# Altium PCB PCB1.PcbDoc (part 3 of 3)
Units mil, origin at the board's own origin, x right, y up, seen from the top; angles counter-clockwise.
Board outline 3930 x 3600 mil, 2 copper layers (Top Layer, Bottom Layer), stack 65.792 mil thick; 169 components, 135 nets, 555 pads, 164 vias.
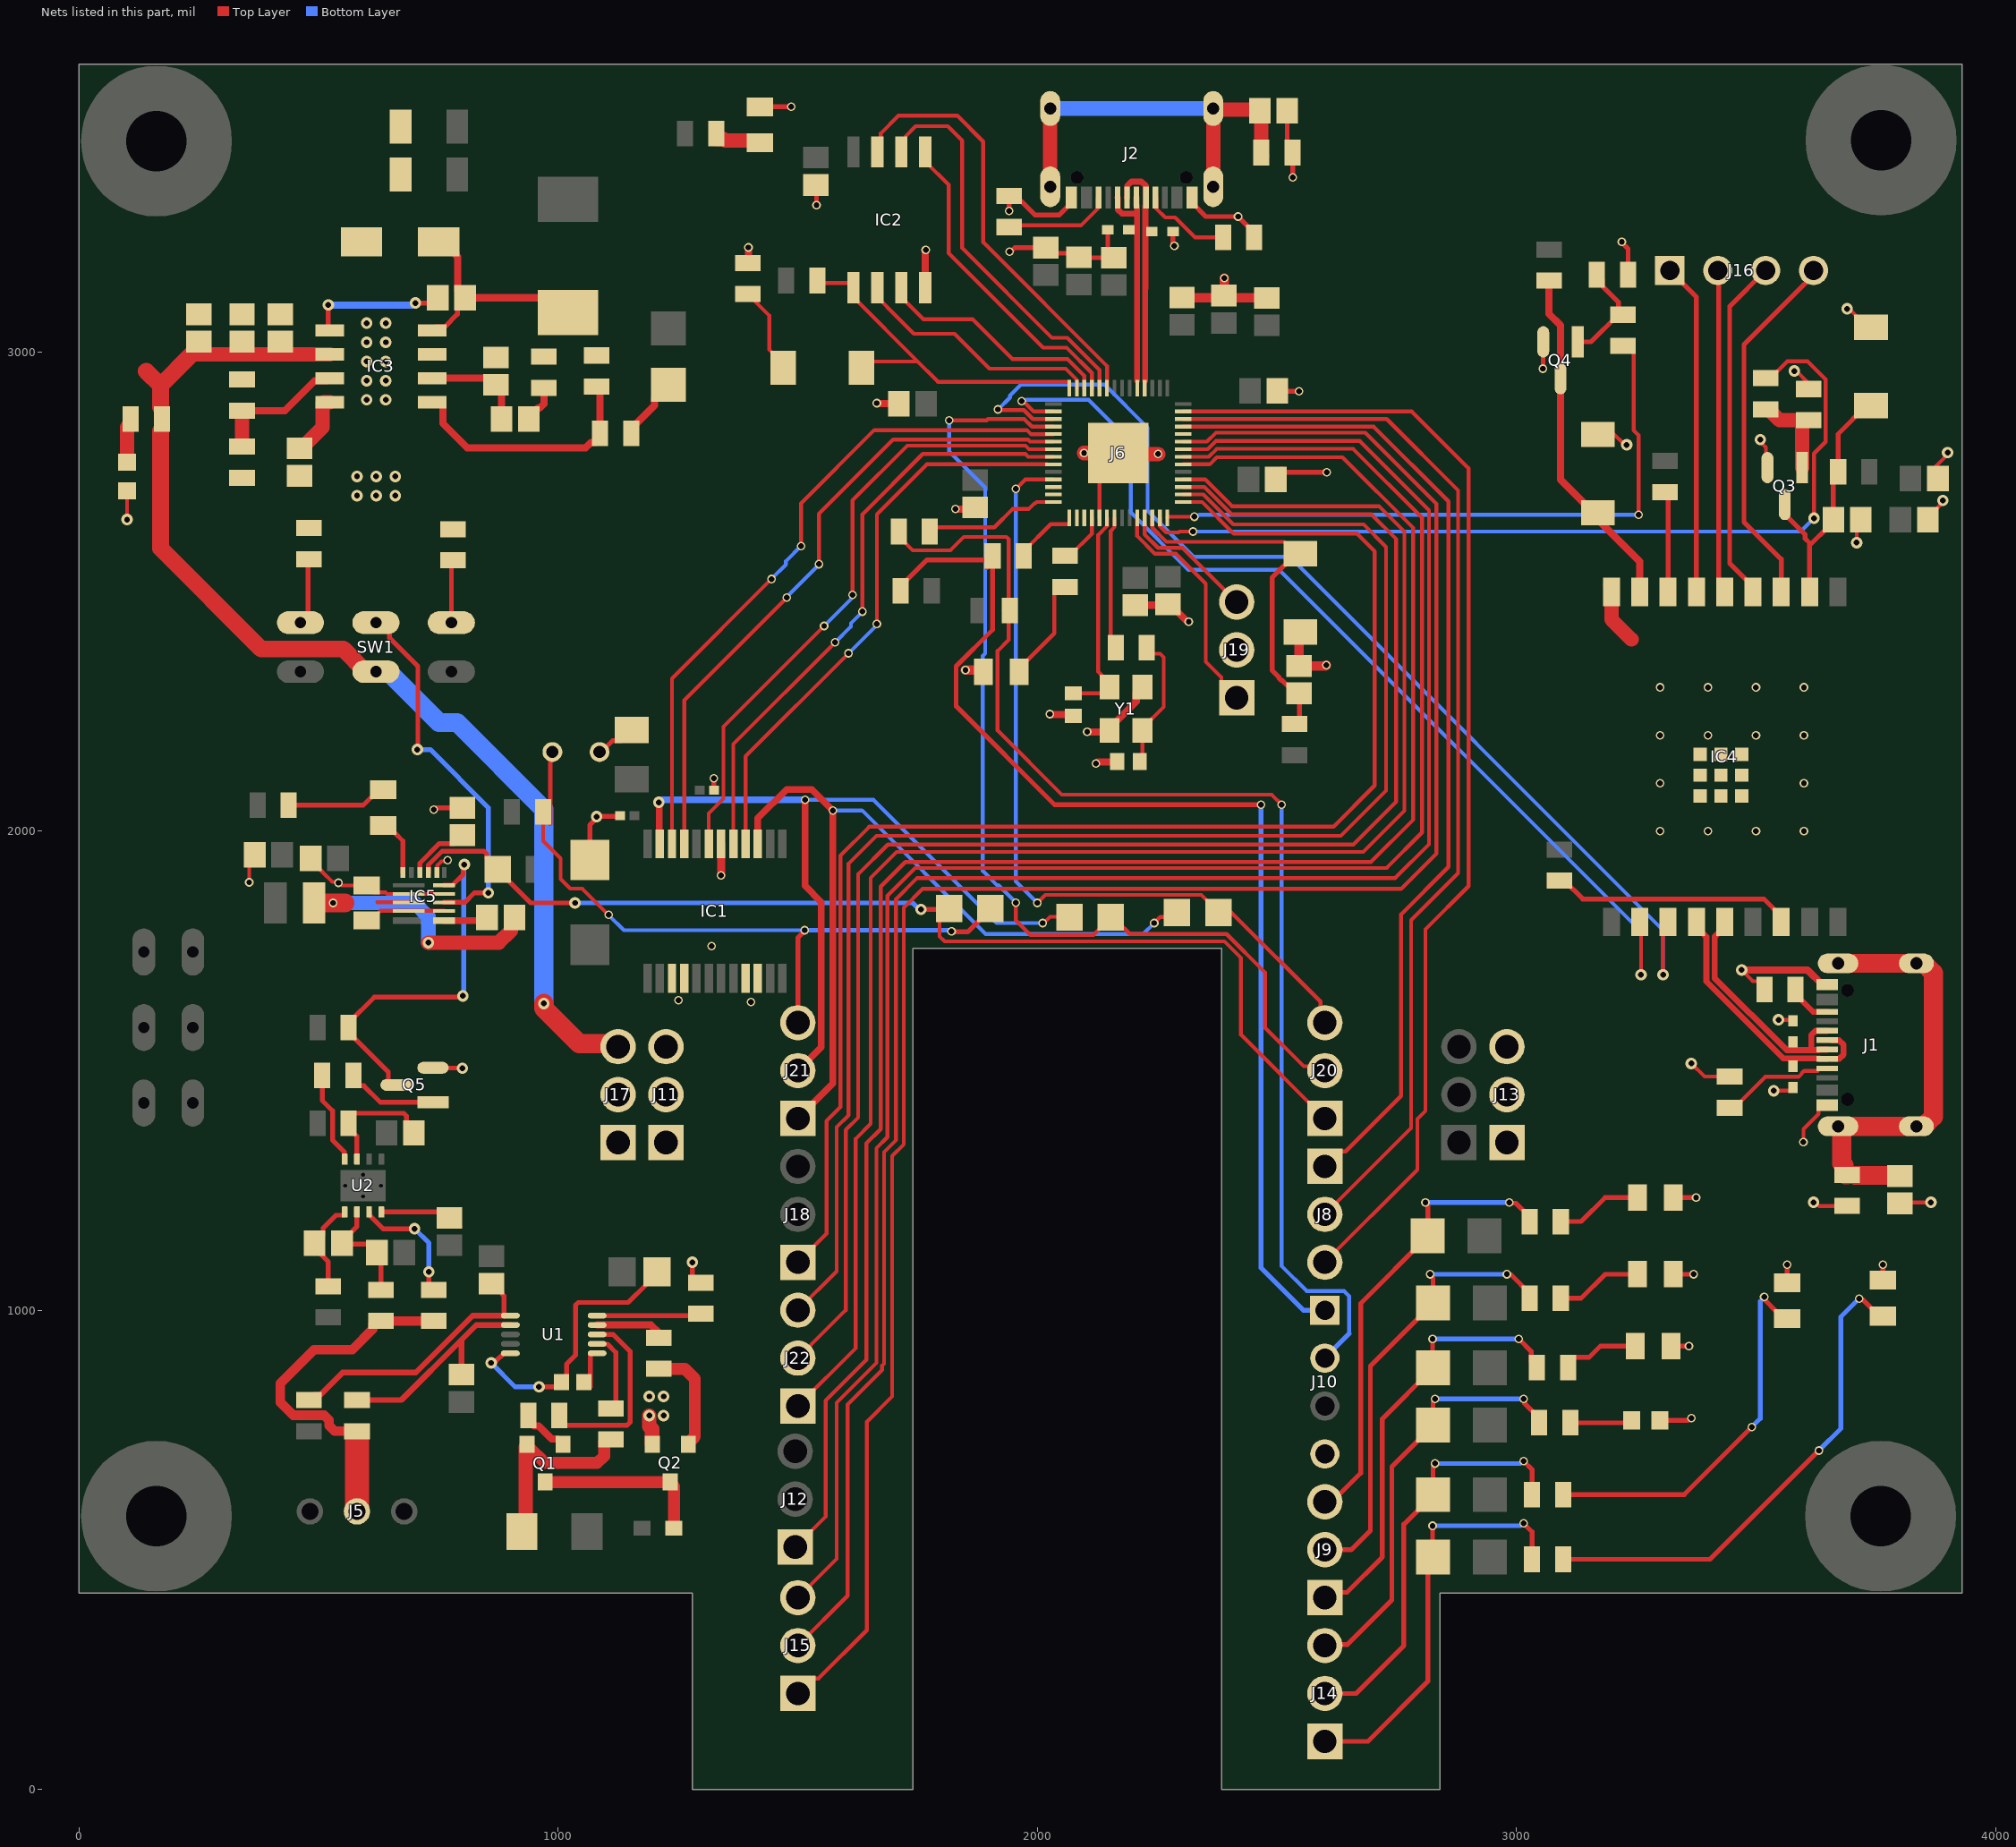
[diagram p2: the nets of this part, all layers, seen from the top]

## Via types
v1: diameter 18, hole 12, Top Layer to Bottom Layer, 108 vias
v2: diameter 24, hole 12, Top Layer to Bottom Layer, 56 vias

## Nets (pads, with @x,y where several pads share a name; then routed paths per layer and width w, separated by ;. In a path a pad name is that pad's centre, name@x,y a point inside that pad or via, vN(x,y) a via of type N, cw(c..) or ccw(c..) an arc to the next point about the centre after c; other vN are vias at no path point) (continued)
Black_1: J6.37 J15.1 | length 4225.5
  Top Layer w8: J15.1@1500,200 1531.39,231.39 1543.39,231.39 1644,332 1644,767 1697,820 1697,1322 1721,1346 1721,1840 1760.35,1879.35 2759.35,1879.35 2833,1953 2833,2683 2684.38,2831.62 2372.81,2831.62 2353.81,2812.62 J6.37@2304.35,2812.62
Black_2: J6.32 J22.1 | length 3426.5
  Top Layer w8: J22.1@1500,800 1621,921 1621,1358 1652,1389 1652,1902 1706.5,1956.5 2680.14,1956.5 2766,2042.36 2766,2625 2713,2678 2406.22,2678 2350.34,2733.88 J6.32@2304.35,2733.88
BOOT_ESP32: IC4.8 Q4.3 R39.2 S4.2 | length 735.2
  Top Layer w15: R39.2@3068,3148.5 3068,3079.37 3091.98,3055.4 Q4.3@3091.98,2944.09 3091.98,2733.47 S4.2@3161.14,2664.31 ; S4.2@3158.42,2661.58 3257.4,2562.6 IC4.8@3257.4,2498.98
  Top Layer w30: S4.2@3161.14,2664.31 S4.2@3170,2664.31
"Charging Select": IC5.9 SW1.2 | length 784.5
  Top Layer w10: SW1.2@631,2446.21 647.85,2429.36 647.85,2403.15 707,2344 707,2171 v2(706,2170) ; IC5.9@761.93,1851.14 805.16,1851.14 825.02,1871 v2(854,1871)
  Bottom Layer w10: v2(706,2170) 733,2170 854,2049 v2(854,1871)
Enable_Charger: IC5.7 Q5.3 R38.1 | length 784
  Top Layer w10: Q5.3@661.55,1470 652.08,1470 645.3,1476.78 645.3,1497.34 562.5,1580.14 R38.1@562.5,1590 562.5,1599.86 615.96,1653.32 798.32,1653.32 v2(801,1656) ; IC5.7@761.93,1887.09 779.39,1887.09 801.32,1909.02 801.32,1927.32 v2(804,1930)
  Bottom Layer w10: v2(801,1656) 802.5,1657.5 802.5,1928.5 v2(804,1930)
Enable_ESP32: C30.1 IC4.2 Q3.3 R33.2 S2.2 | length 534.6
  Top Layer w10: Q3.3@3560,2681.55 3560,2661.23 3602.5,2618.73 3602.5,2610.5 3611.73,2601.27 ; IC4.2@3611.73,2498.98 3611.73,2596.34 C30.1@3653.82,2638.43 ; C30.1@3661.46,2650 3661.46,2740.01 R33.2@3671.45,2750 3671.45,2828.61 3731.14,2888.31 S2.2@3740,2888.31
ESP_CC1: J1.A5 R1.1 | length 216.5
  Top Layer w8: R1.1@3445,1422.5 3454.86,1422.5 3519.36,1487 3589.07,1487 3595.54,1493.47 3595.54,1494.6 3600.23,1499.29 J1.A5@3629,1499.29
ESP_CC2: J1.B5 R3.1 | length 91.1
  Top Layer w12: R3.1@3582.5,1669 3582.5,1659.14 3618.87,1622.77 3648.58,1622.77 J1.B5@3648.68,1622.68
ESP_RX: IC4.11 J6.2 | length 2116.7
  Top Layer w8: v1(1967,2897) 1970.98,2897 1992.36,2875.61 J6.2@2033.65,2875.61 ; IC4.11@3257.4,1810 3260,1807.4 v2(3260,1700)
  Bottom Layer w8: v1(1967,2897) 1968.91,2898.91 1975.6,2898.91 1976.69,2900 2107,2900 2195,2812 2195,2665 2315,2545 2505,2545 3260,1790 v2(3260,1700)
ESP_TX: IC4.12 J6.3 | length 2316.5
  Top Layer w8: v1(1918,2880) 1919.5,2878.5 1971.8,2878.5 1990.43,2859.87 J6.3@2033.65,2859.87 ; v2(3306,1700) 3306,1799.54 IC4.12@3316.46,1810
  Bottom Layer w8: v1(1918,2880) 1942.8,2904.8 1942.8,2908.8 1965.69,2931.69 2140.31,2931.69 2230,2842 2230,2668.33 2325.83,2572.5 2526.5,2572.5 3306,1793 v2(3306,1700)
ESP_USB_D_N: D4.1 IC4.13 J1.A7 J1.B7 | length 529.2
  Top Layer w12.65: IC4.13@3375.51,1810 3375.51,1798.19 3386.9,1786.8 3389.05,1786.8 3396.46,1779.39 3396.46,1686.13 3557.08,1525.52 3631.52,1525.52 3632.78,1524.25 J1.B7@3648.68,1524.25 ; J1.B7@3658,1524.67 3673.67,1524.67 3682.76,1533.76 3682.76,1553.71 3673.26,1563.2 J1.A7@3659,1563.2
ESP_USB_D_P: D2.1 IC4.14 J1.A6 J1.B6 | length 495.1
  Top Layer w12.65: IC4.14@3434.57,1810 3434.57,1798.19 3423.18,1786.8 3421.02,1786.8 3413.61,1779.39 3413.61,1693.24 3564.18,1542.67 3611,1542.67 ; J1.A6@3648.68,1543.94 3632.78,1543.94 3631.52,1542.67 3611,1542.67 ; J1.B6@3648.68,1583.31 3648.26,1582.89 3624.09,1582.89 3615.21,1574.01 3615.21,1546.88 3611,1542.67
GND: C1.1 C2.2 C3.2 C4.1 C5.1 C6.2 C9.1 C10.1 C12.2 C13.2 C14.2 C16.2 C17.2 C18.2 C19.2 C20.2 C21.2 C22.2 C23.2 C24.2 C25.2 C26.2 C27.2 C28.2 C29.2 C30.2 C31.2 C33.2 C34.2 C35.2 C36.2 C40.2 C41.2 C43.2 C44.2 D1.2 D2.2 D3.2 D4.2 D5.2 D6.2 IC1.3 IC1.4 IC1.9 IC1.10 IC1.18 IC2.4 IC3.7 IC4.9 IC4.19 IC4.20 IC4.21 IC4.22 IC4.23 IC4.24 IC4.25 IC4.26 IC4.27 IC5.5 IC5.8 IC5.15 J1.A1_B12 J1.A12_B1 J2.A1_B12 J2.A12_B1 J6.19 J6.57 J10.4 J11.1 J11.2 J11.3 J13.1 J13.2 J13.3 J19.2 LED1.2 LED2.1 LED3.2 LED4.2 LED5.2 LED6.2 LED8.1 LED9.2 LED10.2 Q2.2 Q3.2 Q4.2 Q5.2 R1.2 R2.2 R3.2 R4.2 R6.1 R7.1 R15.1 R16.2 R17.1 R20.2 R21.2 R34.1 R43.1 R48.1 R51.1 RT1.1 S2.1 S3.2 S4.1 Y1.2 Y1.4 | length 4927.8
  Top Layer w8: v2(100,2650) LED2.1@100,2710.47 ; v1(355,1893) 355,1938.54 C43.2@366.46,1950 ; R51.1@464,2635.33 465,2635.33 R51.1@475,2645.33 ; C44.2@483.46,1943 483.46,1939.06 508.73,1913.79 508.73,1913.58 528.4,1893.91 539.09,1893.91 v1(541,1892) 543.71,1892 549.29,1886.42 C40.2@600,1886.42 614.7,1871.72 639.87,1871.72 642.73,1868.86 IC5.15@688.11,1868.86 IC5.8@761.93,1868.86 ; IC5.5@746.57,1913.66 747.5,1914.58 747.5,1928.2 756.22,1936.93 766.92,1936.93 v1(768.84,1938.84) ; R48.1@778,2632 R48.1@780,2630 ; J6.19@2129.63,2653.65 2129.63,2749.63 J6.57@2169,2789 ; IC4.9@3184.63,2512.69 IC4.9@3198.35,2498.98 ; S4.1@3202.05,2829.82 v2@3225.87,2806 ; v2(3365,1515) 3392.5,1487.5 R1.2@3445,1487.5 ; v2(3470,1710) 3493.35,1686.65 3510.85,1686.65 R3.2@3527.5,1670 ; v2(3509,2817) 3509,2812.67 3520.78,2800.89 3520.78,2759.01 Q3.2@3517.95,2756.18 ; v2(3537,1458) 3571.09,1458 D4.2@3576,1462.91 ; v2(3547,1606) 3575.05,1606 D2.2@3577,1604.05 ; v2@3584.13,2960 R34.1@3607.95,2936.18 ; v1(3599,1351) 3599,1378 3630.53,1409.53 3630.53,1420.47 J1.A1_B12@3631.04,1420.98 ; v2(3620,1225) 3624.33,1225 3631.83,1217.5 R6.1@3690,1217.5 ; v2@3694.13,3090 S2.1@3717.95,3066.18 ; v2(3710,2602) 3710,2627.43 3710.53,2627.95 C30.2@3733.82,2627.95 ; C4.1@3800,1222.91 3802.09,1225 v2(3865,1225) ; C23.2@3866.18,2662.05 v2@3890,2685.87 ; C22.2@3876.18,2762.05 v2@3900,2785.87
  Top Layer w10: Q5.2@738.45,1506.02 738.96,1505.51 799.49,1505.51 v2(800,1505) ; v1(740,2045) 742.16,2045 745.71,2048.54 C41.2@800,2048.54 ; D1.2@1066,1939.58 1066,2012.21 1080,2026.21 v2(1080,2030) 1081,2031 1128.1,2031 C2.2@1129.1,2032 ; RT1.1@1086.21,2165 1089.77,2165 1113.22,2188.44 1130.44,2188.44 C1.1@1153,2211 ; v2(1280,1100) 1280,1069.33 1291.84,1057.5 R15.1@1298,1057.5 ; C3.2@1325,2085 v1(1325,2110) ; LED1.2@1421,3511.4 1421.6,3512 v1(1486,3512) ; C6.2@1538,3348.46 1539,3347.46 v1(1539,3306) ; v1(1941,3294) R4.2@1941,3325.5 ; R4.2@1941,3321 1948.34,3313.66 1967.34,3313.66 1995,3286 2045.87,3286 2071.02,3311.15 J2.A12_B1@2071.02,3321.98 ; v1(1942,3209) 1944.16,3209 1952.71,3217.54 C19.2@2018,3217.54 ; C19.2@2021.94,3217.54 2033.48,3206 2078.54,3206 C33.2@2087,3197.54 2088,3196.54 C34.2@2160,3196.54 2146.95,3209.59 D3.2@2146.95,3255 ; D5.2@2283.05,3251 2283.05,3226.12 2286,3223.16 v1(2286,3221) ; J2.A1_B12@2322.98,3321.98 2322.98,3311.15 2351.62,3282.52 v1(2418.84,3282.52) 2452.5,3248.86 R2.2@2452.5,3239 ; C28.2@2501.09,2919 2502.09,2918 v1(2546.5,2918) ; C27.2@2510.18,2750 2511.18,2749 v1(2604,2749) ; C5.1@2521.54,3503 2521.54,3426.96 R7.1@2532.5,3416 2533,3415.5 v1(2533,3364) ; v1(3055,2965) 3055.48,2965.48 3055.48,3020.52 Q4.2@3055.95,3021 ; v1(3220,3230) 3220,3227.84 3233,3214.84 R43.1@3233,3161 ; LED8.1@3299.53,770 3357.84,770 3362.84,775 v1(3365,775) ; LED6.2@3322.4,925 v1(3360,925) ; LED5.2@3327.4,1075 v1(3370,1075) ; LED4.2@3327.4,1235 v1(3375,1235) ; LED9.2@3565,1057.4 v1(3565,1095) ; J1.A1_B12@3631.04,1420.98 3637.85,1427.8 J1.A1_B12@3648.68,1427.8 ; LED10.2@3765,1062.4 v1(3765,1095)
  Top Layer w15: R17.1@1396,3185.5 1397,3186.5 v1(1397,3218) ; v1@1666.81,2892 C24.2@1710.91,2892 ; IC2.4@1766,3133.85 1766,3211.19 1767,3212.19 v1(1767,3213) ; v1(1829,2672) 1866.54,2672 C25.2@1870,2675.46 ; v1(2026,2244) 2026.57,2243.43 2077.95,2243.43 C36.2@2078,2243.38 ; v1(2104,2207) 2147.83,2207 Y1.2@2150.55,2209.72 ; v1(2122,2141) 2122.81,2141 2126.31,2144.5 2165.88,2144.5 C35.2@2166.38,2145 ; Y1.2@2150.55,2214.65 2206.28,2270.37 2206.28,2287.11 Y1.4@2219.45,2300.28 ; C26.2@2204,2471.46 2271,2471.46 C20.2@2273,2473.46 2276.94,2473.46 2312.82,2437.57 2315.43,2437.57 v1(2316,2437) ; v2(3470,1710) 3607.61,1710 3637.85,1679.76 J1.A12_B1@3648.68,1679.76
  Top Layer w17: v1(1339.8,1907.2) IC1.18@1339.8,1973.24
  Top Layer w20: v1(1850,2336) 1883.6,2336 LED3.2@1887.6,2332 ; C17.2@2302,3113.54 2302.5,3113.04 2478.5,3113.04 C29.2@2479,3112.54 ; C18.2@2389,3117.54 2390,3118.54 v1(2390,3154) ; C27.2@2497.54,2734 2497.54,2737.36 C27.2@2510.18,2750 ; S3.2@2549,2415.31 2546,2412.31 C31.2@2546,2344.54 2601.54,2344.54 v1(2603,2346)
  Top Layer w30: v2(1190,780) 1190,757.67 1195.85,751.82 1195.85,721.12 Q2.2@1196.6,720.37 ; v1(2097.5,2789) J6.57@2169,2789 2171,2787 v1(2252,2787) ; IC4.9@3198.35,2498.98 3198.35,2441.65 3240,2400
  other v1: 1402,1643.06 1251,1647 1320,1760 3300,2000 3400,2000 3500,2000 3600,2000 3300,2100 3600,2100 3300,2200 3400,2200 3500,2200 3600,2200 3300,2300 3400,2300 3500,2300 3600,2300 1665,2893
  other v2: 1220,780 1190,820 1220,820 3890,2690 580,2700 620,2700 660,2700 580,2740 620,2740 660,2740 3900,2790 3230,2806 600,2900 640,2900 600,2940 640,2940 3580,2960 600,2980 640,2980 600,3020 640,3020 600,3060 640,3060 3690,3090
GP2: J6.4 J20.2 R5.1 | length 2218.5
  Top Layer w8: v1(1816,2857) 1894.16,2857 1897.16,2860 1972.62,2860 1988.57,2844.06 J6.4@2033.65,2844.12 J6.4@2033.65,2844.12 ; v1(1955,1850.5) 1955,1813.71 1985.55,1783.15 2117.25,1783.15 2153.31,1819.21 R5.1@2153.31,1820 ; R5.1@2147.52,1830 R5.1@2157.52,1840 ; R5.1@2155.41,1822.11 2166.87,1810.65 2167.65,1810.65 2193.31,1785 2395,1785 2475,1705 2475,1590 2555.92,1509.08 2590.92,1509.08 J20.2@2600,1500
  Bottom Layer w8: v1(1816,2857) 1816,2792 1891,2717 1891,2370.65 1886,2365.65 1886,1917 1915.54,1887.46 1918.54,1887.46 1955,1851 v1(1955,1850.5)
GP3: IC1.22 J6.5 | length 1415.8
  Top Layer w8: IC1.22@1237.43,1973.24 1237.43,2318.43 v1(1445,2526) ; v1(1507,2595) 1507,2684 1659.75,2836.75 1811.11,2836.75 1978.19,2836.75 1986.57,2828.37 J6.5@2033.65,2828.37
  Bottom Layer w8: v1(1445,2526) 1475.32,2556.32 1475.32,2563.32 v1(1507,2595)
GP4: IC1.21 J6.6 | length 1360.8
  Top Layer w8: IC1.21@1263.02,1973.24 1263.02,2273.02 v1(1477,2487) ; v1(1544,2557) 1544,2662 1699,2817 1980.27,2817 1984.64,2812.62 J6.6@2033.65,2812.62
  Bottom Layer w8: v1(1477,2487) 1477,2488.5 1544,2555.5 v1(1544,2557)
GP5: IC1.19 J6.7 | length 1311.2
  Top Layer w8: IC1.19@1314.2,1973.24 1314.2,2036.83 1345,2067.63 1345,2218 v1(1555,2428) ; v1(1614,2493) 1614,2690 1728.5,2804.5 1975.09,2804.5 1982.71,2796.87 J6.7@2033.65,2796.87
  Bottom Layer w8: v1(1555,2428) 1612.09,2485.09 1612.09,2491.09 v1(1614,2493)
GP6: IC1.17 J6.8 | length 1252.7
  Top Layer w8: IC1.17@1365.39,1973.24 1365.39,2181.39 v1(1578,2394) ; v1(1635,2458) 1635,2661 1761,2787 1974.91,2787 1980.79,2781.13 J6.8@2033.65,2781.13
  Bottom Layer w8: v1(1578,2394) 1610.82,2426.82 1610.82,2433.82 v1(1635,2458)
GP7: IC1.16 J6.9 | length 1200
  Top Layer w8: IC1.16@1390.98,1973.24 1390.98,2155.98 v1(1606,2371) ; v1(1665,2432) 1665,2661 1769.44,2765.44 J6.9@2020.42,2765.44
  Bottom Layer w8: v1(1606,2371) 1665,2430 v1(1665,2432)
GP8: J6.11 J20.3 R8.1 | length 1708
  Top Layer w8: v1(1955,2714) 1974.88,2733.88 J6.11@2033.65,2733.88 ; v1(2000,1850) 2016.85,1866.85 2342.25,1866.85 2378.31,1830.79 R8.1@2378.31,1830 2382.31,1830 2405,1830 2590.92,1644.08 2590.92,1609.08 J20.3@2600,1600
  Bottom Layer w8: v1(1955,2714) 1955,1895 v1(2000,1850)
GP9: J6.12 | length 0.1
  Top Layer w8: J6.12@2033.65,2718.13 J6.12@2033.65,2718.13
GP10: J6.13
GP11: J10.2 R29.2 R50.2 | length 2623.5
  Top Layer w8: R29.2@1714.5,2611.14 1739.64,2586 1818.55,2586 1846.55,2614 1935.31,2614 1940,2609.31 R50.2@1940,2460.33 ; R50.2@1929.67,2460.33 R50.2@1940,2460.33 ; R50.2@1942.17,2460.33 R50.2@1940,2460.33 ; v1(2510,2055) 2489,2076 2051,2076 1917,2210 1917,2376 1940,2399 1940,2457.33 R50.2@1940,2460.33
  Top Layer w10: R29.2@1710.5,2625 1710.5,2615.14 R29.2@1714.5,2611.14
  Bottom Layer w8: v1(2510,2055) 2510,1092 2562.27,1039.73 2640.27,1039.73 2650.67,1029.33 2650.67,950.67
  Bottom Layer w10: J10.2@2600,900 2650.67,950.67
GP12: J10.1 R36.2 R49.2 | length 2465.7
  Top Layer w10: R49.2@1714.5,2501 1714.5,2510.86 1769.64,2566 R36.2@1898.5,2566 ; R36.2@1894.67,2549.67 1894.67,2562.16 R36.2@1898.5,2566 ; R36.2@1894.67,2552.3 R36.2@1906.5,2564.14 ; v1(2467,2055) 2036,2055 1830.5,2260.5 1830.5,2344.08 1906.5,2420.08 R36.2@1906.5,2564.14 ; R36.2@1898.5,2566 R36.2@1906.5,2574 R36.2@1906.5,2564.14
  Bottom Layer w10: v1(2467,2055) 2467,1088 2555,1000 J10.1@2600,1000
GP13: J6.16
GP14: J6.17
GP15: J6.18 R26.2 | length 108.1
  Top Layer w8: R26.2@2058,2574.5 2067.86,2574.5 2113.88,2620.52 J6.18@2113.88,2653.65
GP16: J6.27 R30.1 | length 1856.1
  Top Layer w8: J6.27@2255.61,2653.65 2255.61,2636.21 2268.83,2622.99 2294.56,2622.99 2296.57,2625 v1(2325,2625) ; R30.1@3520,2945 3529.86,2945 3565.36,2980.5 3607.55,2980.5 3645.2,2942.86 3645.2,2812.19 3621,2787.99 v2(3621,2653)
  Bottom Layer w8: v1(2325,2625) 3593,2625 v2(3621,2653)
GP17: J6.28 R41.1 | length 1359.6
  Top Layer w8: J6.28@2271.36,2653.65 2271.36,2655.94 2271.43,2656 v1(2328,2656) ; R41.1@3222,3012.5 3231.86,3012.5 3244.7,2999.67 3244.7,2836.34 3255,2826.03 v1(3255,2660)
  Bottom Layer w8: v1(2328,2656) 2329.91,2657.91 2335.6,2657.91 2337.69,2660 v1(3255,2660)
GP26_ADC: J6.38
GP27_ADC: J6.39 J8.1 | length 2147.3
  Top Layer w8: J6.39@2304.35,2844.12 2701.88,2844.12 2858,2688 2858,1925 2759,1826 2759,1447 2643.39,1331.39 2632.91,1331.39 2588.69,1287.18 J8.1@2588.69,1276.69
GP28_ADC: J6.40 J8.2 | length 2261.5
  Top Layer w8: J6.40@2304.35,2859.87 2729.13,2859.87 2878,2711 2878,1912 2780,1814 2780,1380 J8.2@2600,1200
GP29_ADC: J6.41 J8.3 | length 2426
  Top Layer w8: J6.41@2304.35,2875.61 2781.39,2875.61 2900,2757 2900,1885 2810,1795 2810,1416 2793,1399 2793,1293 J8.3@2600,1100
IO2: IC4.16 R31.2 | length 505.4
  Top Layer w10: R31.2@3090,1896.5 3099.86,1896.5 3138.36,1858 3516.49,1858 3552.68,1821.81 IC4.16@3552.68,1810
IO8: IC4.7 R32.1 | length 211.2
  Top Layer w10: R32.1@3310,2707.5 3316.46,2701.04 IC4.7@3316.46,2498.98
LED(G1): J14.2 R60.2 R64.1 | length 877.7
  Top Layer w10: J14.2@2600,200 2665,200 2765,300 2765,553.27 2825.94,614.21 R64.1@2825.94,615 2825.94,673.78 2830,677.84 v1(2830,680) ; v1(3015,685) 3032.5,667.5 R60.2@3032.5,615
  Bottom Layer w10: v1(2830,680) 3007.84,680 3012.84,685 v1(3015,685)
LED(G2): J14.1 R65.2 R66.1 | length 869
  Top Layer w10: J14.1@2600,100 2690,100 2815,225 2815,479.06 R66.1@2820.94,485 ; v1(2825,550) 2825,485.94 R66.1@2825.94,485 ; v1(3015,555) 3032.5,537.5 R65.2@3032.5,480
  Bottom Layer w10: v1(2825,550) 3007.84,550 3012.84,555 v1(3015,555)
LED(Green): J9.2 R52.2 R55.1 | length 937.3
  Top Layer w10: J9.2@2600,500 2655,500 2695,540 2695,883.27 2825.94,1014.21 R55.1@2825.94,1015 2825.94,1066.89 2820,1072.84 v1(2820,1075) ; v1(2980,1075) 2981.53,1073.47 2988.89,1073.47 3027.5,1034.86 R52.2@3027.5,1025
  Bottom Layer w10: v1(2820,1075) v1(2980,1075)
LED(Red): J14.3 R57.2 R61.1 | length 885.1
  Top Layer w10: J14.3@2600,300 2601.91,301.91 2646.91,301.91 2740,395 2740,673.27 2825.94,759.21 R61.1@2825.94,760 2825.94,808.78 2830,812.84 v1(2830,815) ; v1(3015,815) 3016.53,813.47 3016.53,805.83 3047.5,774.86 R57.2@3047.5,765
  Bottom Layer w10: v1(2830,815) v1(3015,815)
LED(White): J9.3 R47.2 R54.1 | length 964.8
  Top Layer w10: J9.3@2600,600 2615,600 2675,660 2675,1014.21 2815,1154.21 R54.1@2815,1155 2815,1217.84 2810,1222.84 v1(2810,1225) ; v1(2985,1225) 2986.53,1223.47 2998.89,1223.47 3027.5,1194.86 R47.2@3027.5,1185
  Bottom Layer w10: v1(2810,1225) v1(2985,1225)
LED(Yellow): J9.1 R53.2 R58.1 | length 909.8
  Top Layer w10: J9.1@2600,400 2611.05,411.05 2646.05,411.05 2720,485 2720,773.27 R58.1@2826.34,879.61 ; v1(2825,940) 2825,880.94 R58.1@2825.94,880 ; v1(3005,940) 3030.67,914.33 3030.67,891.84 R53.2@3042.5,880
  Bottom Layer w10: v1(2825,940) v1(3005,940)
Midtap: J5.2 R12.1 R44.1 R46.1 | length 760.7
  Top Layer w20: R12.1@580,747.5 533.41,747.5 521.7,759.22 521.7,770.55 511.58,780.66 447.09,780.66 420,807.75 420,847 490.5,917.5 570,917.5 613.3,960.8 613.3,970.67 620.14,977.5 R44.1@630,977.5 R46.1@740,977.5
  Top Layer w50: J5.2@580,580 580,730
NetC4_2: C4.2 J1.SH1 J1.SH2 J1.SH3 J1.SH4 R6.2 | length 908.4
  Top Layer w40: J1.SH4@3671.32,1723.86 3850.09,1723.86 3870,1703.94 3870,1403.61 J1.SH1@3849.83,1383.44 ; R6.2@3690,1282.5 3686.47,1282.5 3683.3,1285.66 3683.3,1301.93 3679.3,1305.93 3679.3,1383.08 3678.68,1383.7 J1.SH3@3671.32,1383.7 J1.SH1@3834.7,1383.7 ; R6.2@3706.61,1281.25 3798.75,1281.25 C4.2@3800,1280
NetC5_2: C5.2 J2.SH1 J2.SH2 J2.SH3 J2.SH4 R7.2 | length 862.5
  Top Layer w30: J2.SH4@2026.92,3344.61 J2.SH2@2026.92,3508 ; J2.SH3@2367.08,3344.61 J2.SH1@2367.08,3508 2369.58,3505.5 2461.96,3505.5 C5.2@2464.46,3503 2467.67,3499.79 2467.67,3410.84 R7.2@2469.5,3409
  Bottom Layer w30: J2.SH2@2026.92,3508 J2.SH1@2367.08,3508
NetC7_1: C7.1 R10.2 U1.1 | length 573.1
  Top Layer w10: R10.2@480,812.5 491.84,824.33 R10.2@504.33,824.33 ; C7.1@861,1055.46 864.94,1055.46 882.57,1037.82 882.57,1033.88 887,1029.46 887,988.39 899.65,988.39 U1.1@900,988.74
  Top Layer w12: R10.2@504.33,824.33 550,870 703,870 821.39,988.39 U1.1@887,988.39
NetC8_1: C8.1 D6.1 IC3.8 L1.1 | length 476.5
  Top Layer w10: IC3.8@736.77,3045 744.57,3052.8 763.8,3052.8 789.56,3078.56 789.56,3111.02 C8.1@798.54,3120
  Top Layer w15: D6.1@750.71,3230 763.5,3230 786.52,3206.99 786.52,3201.69 790,3198.2 790,3140.86 790.41,3140.46 790.41,3128.14 C8.1@798.54,3120 ; C8.1@805.54,3113 988.89,3113 L1.1@1020,3081.89
NetC8_2: C8.2 IC3.1 | length 287.9
  Top Layer w10: v2(520,3098) 520,3048.23 IC3.1@523.23,3045 ; v2(702,3102) 730.82,3102 745.46,3116.64 C8.2@745.46,3117.06
  Bottom Layer w15: v2(520,3098) 695.56,3098 699.56,3102 v2(702,3102)
NetC11_1: C11.1 R12.2 U1.2 | length 457.3
  Top Layer w10: U1.2@899.65,968.7 U1.2@900,969.05
  Top Layer w12: R12.2@580,812.5 672.5,812.5 798,938 ; C11.1@798,865.54 798,938 ; U1.2@899.65,968.7 828.7,968.7 798,938
NetC15_1: C15.1 C16.1 IC3.6 | length 215
  Top Layer w15: IC3.6@736.77,2945 856.46,2945 C16.1@870,2931.46 881.46,2920 C15.1@881.46,2860
NetC15_2: C15.2 R16.1 | length 80.3
  Top Layer w15: C15.2@938.54,2860 938.54,2863.94 957.28,2882.67 961.21,2882.67 970,2891.46 R16.1@970,2925
NetC21_1: C21.1 IC3.4 | length 132.5
  Top Layer w30: C21.1@460,2798.54 463.94,2798.54 508.21,2842.81 508.21,2892.8 510.41,2895 IC3.4@523.23,2895
NetC31_1: C31.1 J6.26 R35.2 S3.1 | length 761.2
  Top Layer w8: J6.26@2239.87,2653.65 J6.26@2239.87,2653.65 2239.93,2633.07 2269.42,2603.58 2515.25,2603.58 S3.1@2540.14,2578.69
  Top Layer w10: R35.2@2531,2223 2535.16,2223 2547,2234.83 C31.1@2547,2289 ; C31.1@2540,2289.46 2536.06,2289.46 2511.11,2314.41 2509.49,2314.41 2503.93,2319.97 2503.93,2321.59 2490,2335.52 2490,2528.55 2540.14,2578.69 S3.1@2549,2578.69
NetC32_1: C32.1 R37.2 U2.7 | length 260.8
  Top Layer w10: U2.7@579.8,1315.12 579.8,1362.83 562.5,1380.14 562.5,1399.16 574.33,1411 677.4,1411 683.26,1405.14 683.26,1385.28 C32.1@698.54,1370
NetC35_1: C35.1 R40.2 Y1.3 | length 293.2
  Top Layer w8: C35.1@2213.62,2145 2219.45,2150.83 Y1.3@2219.45,2209.72 2219.45,2214.65 2263.83,2259.03 2263.83,2362.83 2256.37,2370.3 2240.33,2370.3 2227.5,2383.14 R40.2@2227.5,2393
NetC36_1: C36.1 J6.20 Y1.1 | length 447.6
  Top Layer w8: C36.1@2075,2287.62 2139.72,2287.62 2144.55,2292.45 2144.55,2315.4 2127,2332.95 2127,2617.83 2145.38,2636.21 J6.20@2145.38,2653.65
NetC37_2: C37.2 C38.1 R44.2 U2.2 | length 239.1
  Top Layer w10: C38.1@548.54,1137.64 603.82,1137.64 630,1111.46 R44.2@630,1042.5 ; C38.1@548.54,1140 548.54,1143.94 579.8,1175.2 U2.2@579.8,1204.88
NetC38_2: C38.2 R45.2 U2.1 | length 203.9
  Top Layer w10: R45.2@520,1050 520,1100.92 490.33,1130.59 490.33,1138.87 509.09,1157.64 509.09,1171.43 535.74,1198.07 553.31,1198.07 554.21,1198.98 U2.1@554.21,1204.88
NetC39_1: C39.1 U2.4 | length 179.1
  Top Layer w10: U2.4@630.98,1204.88 769.93,1204.88 769.93,1199.55 C39.1@794.57,1174.91
NetC40_1: C40.1 IC5.10 IC5.13 | length 170.1
  Top Layer w8: C40.1@600,1813.58 608.86,1813.58 628.7,1833.43 IC5.13@688.11,1833.43 IC5.10@761.93,1833.43
NetC41_1: C41.1 IC5.3 | length 132.3
  Top Layer w10: IC5.3@711.14,1913.66 711.22,1913.74 711.22,1932.93 752.11,1973.82 782.36,1973.82 C41.1@800,1991.46
NetC42_1: C42.1 IC5.11 | length 92.5
  Top Layer w14: IC5.11@761.93,1812.76 844.21,1812.76 C42.1@851.46,1820
NetC42_2: C42.2 IC5.14 L2.1 | length 608.9
  Top Layer w8: 621.97,1851.14 IC5.14@688.11,1851.14
  Top Layer w30: v2(729,1767) 875.95,1767 900.91,1791.95 900.91,1812.36 C42.2@908.54,1820
  Top Layer w40: L2.1@490.48,1850 554.8,1850
  Bottom Layer w30: v1(530,1850) 700,1850 729,1821 v2(729,1767)
NetIC3_3: IC3.3 R14.2 R20.1 | length 286.2
  Top Layer w15: R14.2@340,2877.5 429.5,2877.5 491.7,2939.7 517.93,2939.7 IC3.3@523.23,2945
  Top Layer w30: R20.1@340,2802.5 R14.2@340,2877.5
NetIC3_5: IC3.5 R13.2 R21.1 | length 531.7
  Top Layer w15: IC3.5@736.77,2895 754,2895 759.29,2889.7 759.29,2850.71 810,2800 1057.5,2800 1068.3,2810.8 1078.17,2810.8 1087.5,2820.14 R13.2@1087.5,2830 1087.5,2920 R21.1@1080,2927.5
NetIC5_1: IC5.1 LED7.2 | length 120.6
  Top Layer w10: LED7.2@637.06,2017.94 637.06,2017.41 657.56,1996.91 658.09,1996.91 675.71,1979.29 IC5.1@675.71,1913.66
NetJ6_14: J6.14 R29.1 | length 291.5
  Top Layer w8: R29.1@1768.5,2623 1779.5,2634 1910.21,2634 1948.21,2672 1981.85,2672 1993.85,2684 1995.67,2684 1998.31,2686.64 J6.14@2033.65,2686.64
NetJ6_15: J6.15 R36.1 | length 141.6
  Top Layer w8: R36.1@1971.5,2574 1971.5,2583.86 2028.06,2640.42 2066.57,2640.42 2066.64,2640.48 J6.15@2066.64,2653.65
NetJ6_21: J6.21 R40.1 | length 267.9
  Top Layer w8: J6.21@2161.13,2653.65 2161.13,2634.28 2153,2626.16 2153,2402.5 R40.1@2162.5,2393
NetLED1_1: LED1.1 R19.1 | length 102.6
  Top Layer w30: R19.1@1329.5,3456 1329.5,3446.14 1331.33,3444.3 1345.61,3444.3 1348.91,3441 LED1.1@1420.13,3441
NetLED2_2: LED2.2 R24.2 | length 93.6
  Top Layer w30: LED2.2@100,2769.53 100,2842.64 107.5,2850.14 R24.2@107.5,2860
NetLED3_1: LED3.1 R26.1 | length 222.9
  Top Layer w8: LED3.1@1962.4,2332 1962.4,2339.87 2035.3,2412.78 2035.3,2496.67 2048.14,2509.5 R26.1@2058,2509.5
NetLED4_1: LED4.1 R47.1 | length 180.8
  Top Layer w10: R47.1@3092.5,1185 3135,1185 3185,1235 LED4.1@3252.6,1235
NetLED5_1: LED5.1 R52.1 | length 180.8
  Top Layer w10: R52.1@3092.5,1025 3135,1025 3185,1075 LED5.1@3252.6,1075
NetLED6_1: LED6.1 R53.1 | length 164.5
  Top Layer w10: R53.1@3107.5,880 3107.5,889.86 3119.33,901.7 3151.7,901.7 3175,925 LED6.1@3247.6,925
NetLED7_1: LED7.1 R59.1 | length 193.7
  Top Layer w10: R59.1@437.5,2054 593,2054 LED7.1@620,2081
NetLED8_2: LED8.2 R57.1 | length 134.8
  Top Layer w10: R57.1@3112.5,765 3226.46,765 3240.47,779.02 LED8.2@3240.47,780
NetLED9_1: LED9.1 R60.1 | length 804.6
  Top Layer w10: R60.1@3097.5,615 3350,615 v1(3491,756) ; v1(3517,1028) 3518.53,1026.47 3518.53,1021.19 3542.44,997.28 3550.31,997.28 LED9.1@3565,982.6
  Bottom Layer w10: v1(3491,756) 3509,774 3509,1018.14 3517,1026.14 v1(3517,1028)
NetLED10_1: LED10.1 R65.1 | length 1044.4
  Top Layer w10: R65.1@3097.5,480 3404,480 v1(3631,707) ; v1(3715,1024) 3716.53,1022.47 3722.26,1022.47 3757.13,987.6 LED10.1@3765,987.6
  Bottom Layer w10: v1(3631,707) 3677,753 3677,986 v1(3715,1024)
NetQ1_1: Q1.1 R22.1 | length 128.4
  Top Layer w10: R22.1@925.67,800.18 937.5,788.34 937.5,770.14 R22.1@949.34,758.3 ; Q1.1@999.25,731.09 1010,720.34 Q1.1@1010,720
  Top Layer w15: R22.1@949.34,758.3 959.2,758.3 986.41,731.09 Q1.1@999.25,731.09
NetQ1_2: Q1.2 R25.1 R27.2 | length 423.3
  Top Layer w25: Q1.2@935.2,720 938.45,716.75 938.45,714.78 972.23,681 1081.16,681 1095.8,695.64 1095.8,725.66 1100.14,730 R25.1@1110,730
  Top Layer w30: R27.2@932.01,524.99 932.01,714.84 Q1.2@934.45,717.28
NetQ1_3: Q1.3 Q2.3 R28.2 | length 361.3
  Top Layer w25: Q1.3@972.6,641.26 972.78,641.44 1233.82,641.44 Q2.3@1234,641.63 1234,639.66 1241.46,632.2 R28.2@1241.46,545
NetQ2_1: Q2.1 R23.1 | length 225.8
  Top Layer w25: R23.1@1210,877.5 1264.5,877.5 1285,857 1285,735.94 1271.4,722.34 Q2.1@1271.4,720.37
NetQ3_1: Q3.1 R30.2 R34.2 | length 211.7
  Top Layer w30: R30.2@3520,2880 3529.86,2880 3531.7,2878.16 3531.7,2875.07 3549.27,2857.5 R34.2@3610,2857.5 3600.14,2857.5 3596.02,2853.39 Q3.1@3596.02,2758.45
NetQ4_1: Q4.1 R41.2 R43.2 | length 223.3
  Top Layer w10: Q4.1@3128,3021 3155.64,3021 3212.14,3077.5 R41.2@3222,3077.5 3213.05,3086.45 3213.05,3103.48 3179.84,3136.69 3179.84,3149.16 R43.2@3168,3161
NetQ5_1: Q5.1 R42.2 | length 194.9
  Top Layer w10: R42.2@572.5,1490 572.5,1480.14 584.33,1468.3 594.2,1468.3 628.52,1433.98 Q5.1@738.45,1433.98
NetR11_2: R11.2 R13.1 | length 133.5
  Top Layer w15: R13.1@1152.5,2830 1152.5,2839.86 1201.28,2888.64 1201.28,2903.01 1229.21,2930.94 R11.2@1230,2930.94
NetR15_2: R15.2 U1.10 | length 211.2
  Top Layer w10: U1.10@1081.1,988.74 R15.2@1292.26,988.74
NetR17_2: R17.2 S1.1 | length 202
  Top Layer w8: R17.2@1396,3120.5 1440.34,3076.16 1440.34,3004.82 S1.1@1488.41,2956.75
NetR18_1: R18.1 RNTC1.2 U1.5 | length 586.5
  Top Layer w10: v2(860,890) 862.68,892.68 868.9,892.68 886.22,910 U1.5@900,910 ; v2(960,840) R18.1@1006.34,840 ; R18.1@1006.34,850 1017.2,860.87 1017.2,887.2 1036,906 1036,1010.14 1041.86,1016 1146,1016 1182.81,1052.81 1182.81,1054.37 1204.8,1076.36 RNTC1.2@1206.36,1076.36
  Bottom Layer w10: v2(860,890) 910,840 v2(960,840)
NetR18_2: R18.2 U1.6 | length 83.3
  Top Layer w10: R18.2@1067.33,840 1067.33,909.16 1068.17,910 U1.6@1081.1,910
NetR22_2: R22.2 U1.8 | length 390.8
  Top Layer w10: R22.2@996.03,786.47 R22.2@1002.5,780 ; R22.2@1002.5,760 1144.14,760 1150,765.86 1150,914 1114.98,949.02 1081.45,949.02 U1.8@1081.1,949.37
NetR23_2: R23.2 U1.9 | length 145.8
  Top Layer w10: R23.2@1210.14,952.5 R23.2@1220,952.5
  Top Layer w15: U1.9@1081.1,969.05 1193.59,969.05 R23.2@1210.14,952.5
NetR25_2: R25.2 U1.7 | length 167.4
  Top Layer w10: U1.7@1081.1,929.68 1081.45,929.33 1102.67,929.33 1120,912 1120,805 R25.2@1110,795
NetR46_2: R46.2 U2.3 | length 256.6
  Top Layer w10: U2.3@605.39,1204.88 605.39,1198.98 634.37,1170 v2(700,1170) ; v2(730,1080) 730,1052.5 R46.2@740,1042.5
  Bottom Layer w10: v2(700,1170) 730,1140 v2(730,1080)
NetR48_2: R48.2 SW1.3 | length 130
  Top Layer w10: SW1.3@776.96,2435 R48.2@776.96,2565
NetR51_2: R51.2 SW1.1 | length 138.9
  Top Layer w10: SW1.1@462,2435 477.5,2450.5 R51.2@477.5,2567.5
NTC: IC5.4 J20.1 R56.2 R63.2 | length 2267
  Top Layer w8: R56.2@1815.69,1838 1796,1818.31 1796,1780 1806.5,1769.5 2390.5,1769.5 2425,1735 2425,1575 J20.1@2600,1400
  Top Layer w10: IC5.4@728.86,1913.66 IC5.4@728.86,1913.66 728.94,1929.44 757.34,1957.84 844.97,1957.84 850.83,1951.98 850.83,1943.35 856.76,1937.41 R63.2@882.59,1937.41 ; R63.2@873.39,1920 873.39,1919.21 942.6,1850 v2(1035,1850) ; v2(1757,1836.5) R56.2@1789.27,1836.5
  Bottom Layer w10: v2(1035,1850) 1739.71,1850 1753.21,1836.5 v2(1757,1836.5)
Orange_1: J6.35 J15.3 | length 3935.4
  Top Layer w8: J15.3@1500,400 1581,481 1581,807 1664,890 1664,1338 1687,1361 1687,1865 1745,1923 2729,1923 2803,1997 2803,2654 2659,2798 2374.55,2798 2357.67,2781.13 J6.35@2304.35,2781.13
Orange_2: J6.30 J22.3 | length 3138.6
  Top Layer w8: J22.3@1500,1000 1581,1081 1581,1382 1606,1407 1606,1932 1664,1990 2633.64,1990 2728,2084.36 2728,2593 2681,2640 2408.87,2640 2346.48,2702.39 J6.30@2304.35,2702.39
Out: R42.1 U2.8 | length 204.1
  Top Layer w10: U2.8@554.21,1315.12 553.31,1316.02 553.31,1330.69 529,1355 529,1416.18 507.5,1437.67 R42.1@507.5,1480.14 ; R42.1@507.5,1480.14 R42.1@507.5,1490 R42.1@507.5,1480.14
PWMA: IC1.23 J21.2 R5.2 | length 1656.8
  Top Layer w8: v1(2011,1808) 2013.71,1808 2026.71,1821 2065.69,1821 R5.2@2066.69,1820
  Top Layer w14: v2(1210,2060) 1210.92,2059.08 1210.92,1974.16 IC1.23@1211.84,1973.24 ; J21.2@1500,1500 1549,1549 1549,1851.62 1515,1885.62 v1(1515,2065)
  Bottom Layer w8: v1(1515,2065) 1658,2065 1915,1808 v1(2011,1808)
  Bottom Layer w14: v2(1210,2060) 1212.71,2060 1217.71,2065 v1@1513.92,2065
PWMB: IC1.15 J21.1 R8.2 | length 1770.4
  Top Layer w8: v1(2244,1808) 2256.82,1820.82 2282.51,1820.82 R8.2@2291.69,1830
  Top Layer w14: IC1.15@1416.57,1973.24 1416.57,2026.57 1477,2087 1528.99,2087 v1(1573,2042.99) 1573,1473 J21.1@1500,1400
  Bottom Layer w8: v1(1573,2042.99) 1634.01,2042.99 1892,1785 2221,1785 v1(2244,1808)
QSPI_CS: IC2.1 J6.56 R9.2 S1.2 | length 770.2
  Top Layer w8: R9.2@1540.5,3143.58 1607.2,3143.58 1616,3134.79 IC2.1@1616,3133.85 1616,3114.17 1750.17,2980 ; S1.2@1616.65,2980 1750.17,2980 ; J6.56@2066.64,2924.35 2066.64,2937.52 2066.57,2937.58 1792.59,2937.58 1789.17,2941 1750.17,2980
QSPI_SCLK: IC2.6 J6.52 | length 829.7
  Top Layer w8: IC2.6@1716,3417.32 1724.8,3426.11 1724.8,3449.8 1746,3471 1813,3471 1843,3441 1843,3217 2030.5,3029.5 2062.5,3029.5 2129.63,2962.37 J6.52@2129.63,2924.35
QSPI_SD0: IC2.5 J6.53 | length 665.8
  Top Layer w8: IC2.5@1766,3417.32 1766,3397.63 1815,3348.63 1815,3206 2012,3009 2061,3009 2113.82,2956.18 2113.82,2924.42 J6.53@2113.88,2924.35
QSPI_SD1: IC2.2 J6.55 | length 524.9
  Top Layer w8: IC2.2@1666,3133.85 1666,3114.17 1705.4,3074.77 1742.31,3037.86 1827.14,3037.86 1900,2965 2059.17,2965 2082.39,2941.79 J6.55@2082.39,2924.35
QSPI_SD2: IC2.3 J6.54 | length 495.4
  Top Layer w8: IC2.3@1716,3133.85 1716,3114.17 1762.17,3068 1865,3068 1948,2985 2063,2985 2098.07,2949.93 J6.54@2098.13,2924.35 J6.54@2098.13,2924.35
QSPI_SD3: IC2.7 J6.51 | length 914.9
  Top Layer w8: IC2.7@1666,3417.32 1673.28,3424.6 1673.28,3456.28 1710,3493 1833,3493 1887,3439 1887,3229 2145.38,2970.62 J6.51@2145.38,2924.35
Red_1: J6.36 J15.2 | length 4079.9
  Top Layer w8: J15.2@1500,300 1604,404 1604,803 1676,875 1676,884.32 1680,888.32 1680,1330 1705,1355 1705,1858 1749,1902 2747,1902 2817.5,1972.5 2817.5,2669.5 2673,2814 2372.87,2814 2355.74,2796.87 J6.36@2304.35,2796.87
Red_2: J6.31 J22.2 | length 3285.4
  Top Layer w8: J22.2@1500,900 1600,1000 1600,1376 1626,1402 1626,1910 1688,1972 2659.64,1972 2749,2061.36 2749,2609 2697,2661 2405.55,2661 2348.41,2718.13 J6.31@2304.35,2718.13
RP_CC1: J2.A5 R2.1 | length 187.9
  Top Layer w8: J2.A5@2246.21,3321.98 2248.12,3320.07 2248.12,3299.19 2266.87,3280.44 2287.67,3280.44 2329.12,3239 R2.1@2387.5,3239
RP_CC2: J2.B5 R4.1 | length 222.4
  Top Layer w8: R4.1@1941.98,3264 2091.01,3264 2126.2,3299.19 2126.2,3320.07 J2.B5@2128.1,3321.98
RP_USB_D_N: D5.1 J2.A7 J2.B7 J6.46 | length 478
  Top Layer w12.65: J2.A7@2187.16,3321.98 2187.58,3322.4 2187.58,3346.56 2196.45,3355.44 2217.23,3355.44 2226.11,3346.56 2226.11,3322.4 J2.B7@2226.53,3321.98 2226.53,3306.08 2225.26,3304.82 2225.26,3131.9 2225.1,3131.75 J6.46@2225.1,2940
RP_USB_D_P: D3.1 J2.A6 J2.B6 J6.47 | length 451.8
  Top Layer w12.65: J2.B6@2167.47,3321.98 2167.89,3321.56 2167.89,3297.39 2176.77,3288.51 2206.62,3288.51 2208.11,3290 ; J2.A6@2206.84,3321.98 2206.84,3306.08 2208.11,3304.82 2208.11,3139.01 2207.95,3138.85 J6.47@2207.95,2940
SWCK: J6.24 J19.1 | length 484.8
  Top Layer w8: J6.24@2208.37,2653.65 2208.37,2615.63 2245.42,2578.58 2289.42,2578.58 2351.59,2516.41 2351.59,2353.41 2384.11,2320.89 2384.11,2310.91 J19.1@2414.84,2280.18
SWDO: J6.25 J19.3 | length 271.8
  Top Layer w8: J6.25@2224.18,2640.42 2224.18,2618.82 2251.92,2591.08 2302.92,2591.08 J19.3@2416,2478
TCK: IC4.5 J16.2 | length 677.1
  Top Layer w10: J16.2@3420,3170 3421.85,3168.15 3421.85,2511.69 IC4.5@3434.57,2498.98
TDI: IC4.4 J16.3 | length 722.4
  Top Layer w10: IC4.4@3493.62,2498.98 3493.62,2510.79 3480.91,2523.5 3480.61,2523.5 3445,2559.11 3445,3095 J16.3@3520,3170
TDO: IC4.6 J16.1 | length 694
  Top Layer w10: J16.1@3320,3170 3375.51,3114.49 IC4.6@3375.51,2498.98
Temp: J21.3 R56.1 R62.1 RT1.2 | length 1492.3
  Top Layer w8: R62.1@968.5,2040 968.5,2030.14 968.5,1979.43 1005,1942.93 1005,1900 1025,1880 1050,1880 v1(1105,1825)
  Top Layer w10: R62.1@968.5,2040 968.5,2030.14 983.31,2015.33 983.31,2150 RT1.2@989.89,2156.59 ; J21.3@1500,1600 1500,1776.84 1514,1790.84 v1(1514,1793) ; v1(1821,1791) 1822.47,1789.53 1854.63,1789.53 1902.31,1837.21 R56.1@1902.31,1838
  Bottom Layer w8: v1(1105,1825) 1137,1793 v1(1514,1793)
  Bottom Layer w10: v1(1514,1793) 1813.34,1793 1813.81,1792.53 1819.47,1792.53 v1(1821,1791)
TMS: IC4.3 J16.4 | length 763.3
  Top Layer w10: IC4.3@3552.68,2498.98 3552.68,2567.32 3475,2645 3475,3015 3620,3160 J16.4@3620,3170
Vin_buck: C12.1 C13.1 C14.1 IC3.2 J17.1 J17.2 J17.3 R14.1 R24.1 SW1.5 | length 2392.2
  Top Layer w30: R24.1@170,2835.18 170.66,2835.85 170.66,2884.15 R24.1@170,2884.82 ; 235,2995 IC3.2@523.23,2995 ; SW1.5@598.56,2332.64 SW1.5@619.48,2332.64
  Top Layer w35: 140,2960 170,2930 ; R24.1@170,2835.18 170,2590 380,2380 551.2,2380 SW1.5@598.56,2332.64 ; R24.1@170,2884.82 170,2930 ; 235,2995 170,2930
  Top Layer w40: v2(970,1640) 970,1630 1043.53,1556.47 1118.53,1556.47 J17.3@1125,1550
  Bottom Layer w40: SW1.5@619.48,2332.64 645.07,2332.64 751.42,2226.29 789.04,2226.29 970,2045.33 v2(970,1640)
Yellow_1: J6.34 J12.1 | length 3777.9
  Top Layer w8: J12.1@1494.47,505.53 1558,569.07 1558,811 1643,896 1643,1348 1673,1378 1673,1884 1724.5,1935.5 2696.14,1935.5 2784.5,2023.86 2784.5,2632.5 2636.93,2780.07 2374.3,2780.07 2359.6,2765.38 J6.34@2304.35,2765.38
Yellow_2: J6.29 J18.1 | length 2992.3
  Top Layer w8: J18.1@1500,1100 1560,1160 1560,1395 1589,1424 1589,1949 1649,2009 2618,2009 2704,2095 2704,2583.72 2666.95,2620.77 2409.63,2620.77 2343.76,2686.64 J6.29@2304.35,2686.64
pads on no net: IC4.10 IC4.15 IC4.17 IC4.18 IC5.2 IC5.6 J1. J1.A8 J1.B8 J2. J2.A8 J2.B8 SW2.1 SW2.6 U1.4

## Polygon pours and split planes (outlines as drawn)
Bat+ on Top Layer "BAT+_L01_P025" (solid, pour order 25): 1165,2005.84 1165,1795.84 1170,1790.84 1195,1790.84 1195,2005.84 1185,2015.84
NetC42_2 on Top Layer "NetC45_2" (solid, pour order 3): 490,1865 643.99,1865 643.99,1835 490,1835
GND on Top Layer "GND_L01_P004" (solid, pour order 4): 230,2760 990,2760 990,2620 230,2620
Vin_buck on Top Layer "VIN_BUCK_L01_P005" (solid, pour order 5): 120,3040.52 455.75,3040.52 485.75,3010.52 535.75,3010.52 535.75,2980.52 485.75,2980.52 455.75,2950.52 225.75,2950.52 120,2950.52
GND on Top Layer "GND_L01_P006" (solid, pour order 6): 220,3060 460,3060 460,3190 670,3190 670,3520 540,3520 540,3500 220,3180
GND on Top Layer "GND_L01_P007" (solid, pour order 7): 580,3200 580,2750 670,2750 670,3200
GND on Top Layer "GND_L01_P008" (solid, pour order 8): 665,3010 665,2980 1160,2980 1160,3010
+3V3 on Top Layer "+3V3_L01_P009" (solid, pour order 9): 770,3500.43 770,3310 1180,3310 1200,3290 1200,3060 1260,3060 1260,3490
GND on Top Layer "GND_L01_P010" (solid, pour order 10): 3200,2410 3200,1920 3660,1920 3660,2410
+5_Charging on Top Layer "+5_CHARGING_L01_P011" (solid, pour order 11): 369,2023 553,2023 553,2016 666,1903 666,1894 716,1894 719,1891 719,1881 652,1881 651.5,1880.5 633,1899 633,1912 529,1912 516,1925 516,1972 411,1974 401,1999
GND on Top Layer "GND_L01_P012" (solid, pour order 12): 1170,710 1240,710 1240,850 1170,850
Bat- on Top Layer "BAT-_L01_P013" (solid, pour order 13): 595,1290 685,1290 685,1326.46 646.46,1365 595,1365
GND on Top Layer "GND_L01_P015" (solid, pour order 15): 1383.64,1709.09 1385,1707.73 1385,1633 1420,1633 1420,1722.27 1385,1722.27
GND on Top Layer "GND_L01_P016" (solid, pour order 16): 1232.01,1710.5 1233.37,1709.14 1233.37,1634 1268.37,1634 1268.37,1723.68 1233.37,1723.68
Vin_buck on Top Layer "VIN_BUCK_L01_P017" (solid, pour order 17): 1075,1595 1175,1595 1175,1300 1075,1300
+3V3 on Top Layer "+3V3_L01_P018" (solid, pour order 18): 2830,1600 2930,1600 2930,1300 2830,1300
Bat+ on Top Layer "BAT+_L01_P019" (solid, pour order 19): 1476,2003 1476,1906 1453,1883 1434,1902 1432,1902 1434,1904 1434,2003
B02 on Top Layer "B02_L01_P020" (solid, pour order 20): 1331,1722 1373,1722 1373,1652 1360,1639 1345,1639 1331,1653 1331,1721
A02 on Top Layer "A02_L01_P021" (solid, pour order 21): 1281,1722 1323,1722 1323,1652 1310,1639 1295,1639 1281,1653 1281,1721
A01 on Top Layer "A01_L01_P022" (solid, pour order 22): 1178,1722 1220,1722 1220,1652 1207,1639 1192,1639 1178,1653 1178,1721
B01 on Top Layer "B01_L01_P023" (solid, pour order 23): 1434,1723 1476,1723 1476,1653 1463,1640 1448,1640 1434,1654 1434,1722
GND on Top Layer "GND_L01_P024" (solid, pour order 24): 1240,1720 1240,1740 1270,1770 1380,1770 1420,1730 1420,1720 1407.73,1707.73 1385,1707.73 1385,1722.27 1370,1737.27 1370,1750 1280,1750 1268.37,1738.37 1268.37,1711.63 1270,1710 1250,1710
GND on Bottom Layer "GND_L02_P002" (solid, pour order 2): 0,411 1280,411 1280,0 1740,0 1740,1756 2385,1756 2385,0 2840,0 2840,411 3930,411 3930,3601 0,3601

## Silkscreen, mask and mechanical layers (free items; w line width, h text height)
Top Overlay:
  circle w10: c3660,955 r225.94
  lines w10: 3495,865 ccw(c3667.5,1037.5) 3840,865 ; 3635,870 3690,870 3635,925 3635,870

## Text inside footprints (layer, text, board x,y; h text height)
J1: Mechanical 13 "PCB EDGE" at 3923.28,1770.31 h39.37 r90
J2: Mechanical 13 "PCB EDGE" at 1980.46,3596.58 h39.37 r180